# Allegro board SCHOLAR_BOARD_FILE.brd
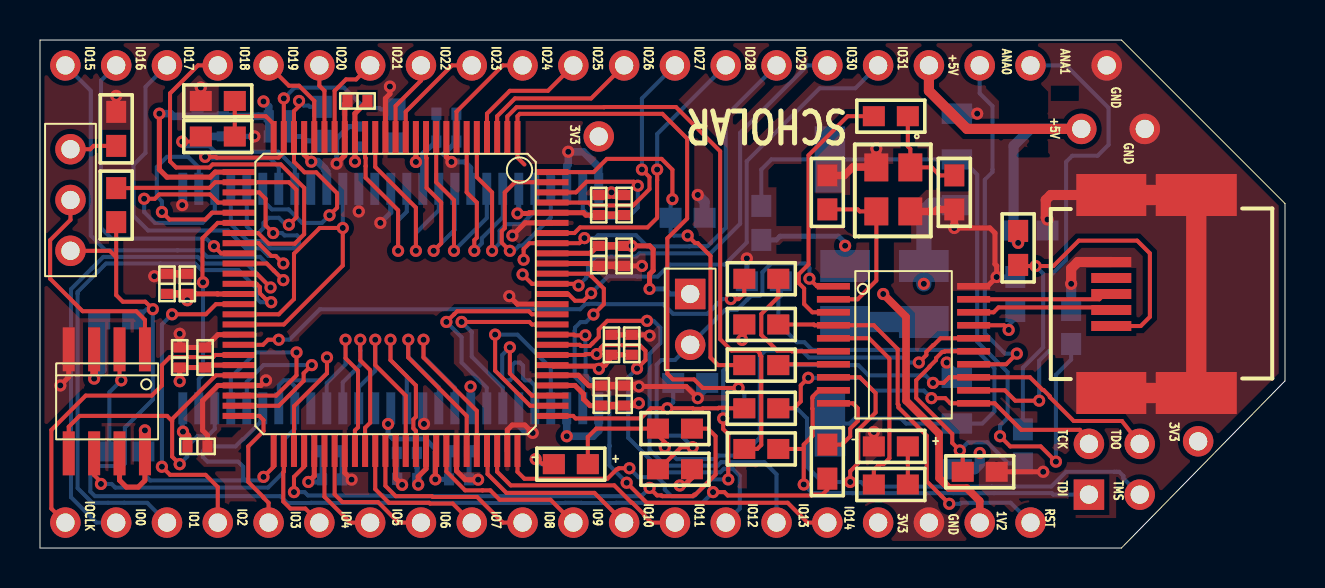
[diagram p0: board, top side]
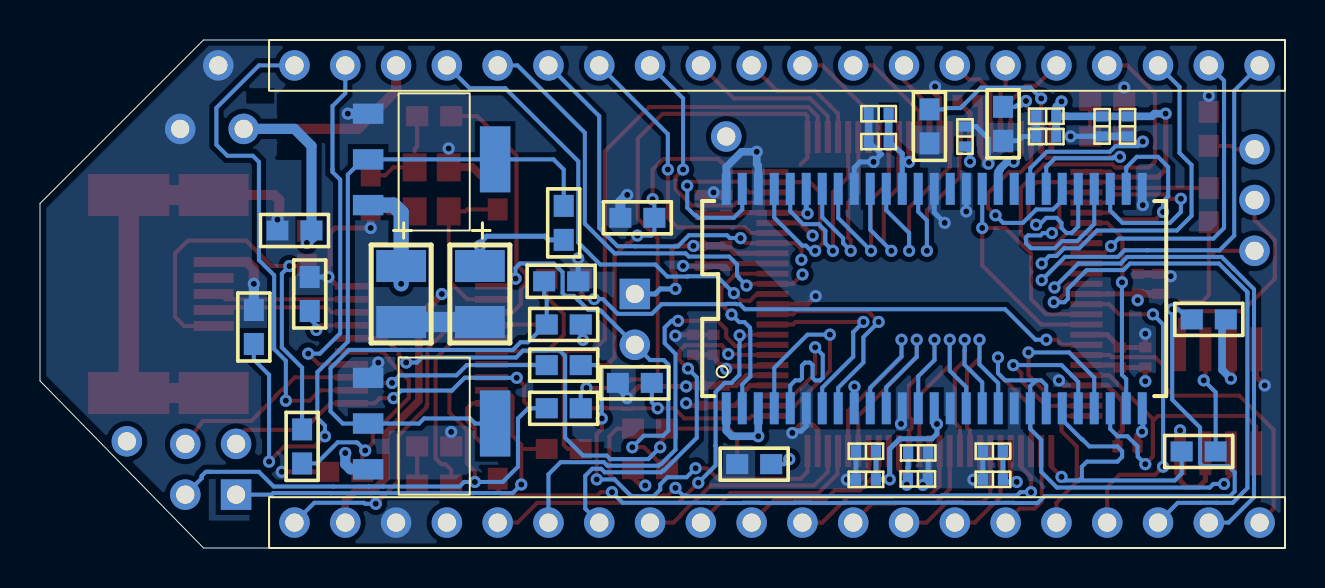
[diagram p1: board, bottom side, seen from below]

Outline 62.26 x 25.4 mm; copper layers: TOP, GND, PWR, BOTTOM. Coordinates in mm from the lower left corner of the outline.
Outline path: 0,25.4 0,0 54.08,0 62.26,8.36 62.26,17.22 54.08,25.4 0,25.4

## Design rules (mm)
net group USB_D: nets USB_D+ USB_D-
net group MG1: nets A0 A1 A2 A3 A4 A5 A6 A7 A8 A9 A10 A11 BS CAS# D0 D1 D2 D3 D4 D5 D6 D7 D8 D9 D10 D11 D12 D13 D14 D15 RAS# SDRAM_CLK WE#
nets with their own width: min track width 0.254; nets +5V GND_POWER VCC_1.2V VCC_3.3V

## Placement (name value [footprint] x y rotation side)
C1  0.47uf  [C0603]  48.77 12.7 90 bottom
C2  10PF  [C0603]  45.72 17.78 90 top
C3  10PF  [C0603]  39.37 17.78 270 top
C4  0.1uF  [C0402]  20.95 3.43 0 bottom
C5  0.1uF  [C0402]  27.94 17.14 90 top
C6  0.1uF  [C0402]  27.94 14.61 270 top
C7  0.1uF  [C0402]  14.61 3.43 0 bottom
C8  0.1uF  [C0402]  20.32 21.72 0 bottom
C9  0.1uF  [C0402]  28.07 7.62 90 top
C10  0.1uF  [C0402]  9.14 21.08 270 bottom
C11  0.1uF  [C0402]  11.94 20.57 0 bottom
C12  0.1uF  [C0402]  7.87 5.08 0 top
C13  0.1uF  [C0402]  7.87 21.08 270 bottom
C14  0.1uF  [C0402]  6.99 9.53 90 top
C15  0.01uF  [C0402]  29.21 14.61 270 top
C16  0.01uF  [C0402]  20.95 4.84 0 bottom
C17  0.01uF  [C0402]  8.26 9.53 90 top
C18  0.01uF  [C0402]  20.32 20.32 0 bottom
C19  0.01uF  [C0402]  14.61 4.84 0 bottom
C20  0.01uF  [C0402]  29.21 7.62 90 top
C21  0.01uF  [C0402]  11.94 21.59 0 bottom
C22  0.01uF  [C0402]  29.21 17.14 90 top
C23  0.1uF  [C0402]  18.34 4.76 180 bottom
C24  0.1uF  [C0402]  6.35 13.21 90 top
C25  0.1uF  [C0402]  28.57 10.16 90 top
C26  0.1uF  [C0402]  7.37 13.21 90 top
C27  0.01uF  [C0402]  16 20.57 90 bottom
C28  0.01uF  [C0402]  29.59 10.16 90 top
C29  0.01uF  [C0402]  15.88 22.35 180 top
C30  0.01uF  [C0402]  18.36 3.45 180 bottom
C31  4.7uF  [C0603]  49.53 15.88 0 bottom
C32  4.7uF  [C0603]  36.2 13.34 180 bottom
C33  22uF  [C1210]  44.2 12.7 270 bottom
C34  4.7uF  [C0603]  51.56 11.05 90 bottom
C35  22uF  [C1210]  40.26 12.7 270 bottom
D1  LED  [D0603]  42.55 5.08 180 top
D2  LED  [D0603]  26.54 4.19 180 top
J1  CON20  [JUMPER1X20]  1.27 1.27 0 top
J2  CON20  [JUMPER1X20]  1.27 24.13 0 top
J3  HEADER 2X2  [JUMPER2X2_SAPT]  52.45 2.67 0 top
J7  USB_MINI_RECEP  [USB_SAPT]  53.57 11.1 90 top
J8  PWR  [JUMPER2]  32.51 12.7 270 top
JP1  3PIN JUMPER  [JUMPER3]  1.52 14.86 90 top
NOREF  -  []  -0.64 0 90 top
NOREF#2  -  []  0 0 0 top
NOREF#3  -  []  13.97 1.27 90 top
R1  5.1K  [R0603]  36.07 11.18 0 top
R2  100E  [R0603]  36.07 9.14 180 top
R3  5.1K  [R0603]  42.55 21.59 0 top
R4  100E  [R0603]  31.75 5.97 0 top
R5  100E  [R0603]  36.07 4.95 180 top
R6  100E  [R0603]  36.07 9.14 180 bottom
R7  100E  [R0603]  36.07 13.46 0 top
R8  100E  [R0603]  36.07 6.99 180 bottom
R9  100E  [R0603]  36.07 6.99 180 top
R10  330E  [R0603]  42.55 3.17 0 top
R11  1K  [R0603]  32.38 16.51 0 bottom
R12  1K  [R0603]  32.51 8.26 0 bottom
R13  47K  [R0603]  3.81 11.43 180 bottom
R14  1K  [R0603]  3.81 17.14 270 top
R15  110E  [R0603]  4.32 4.83 180 bottom
R16  1K  [R0603]  14.1 21.21 90 bottom
R17  1K  [R0603]  17.78 21.08 90 bottom
R18  0E  [R0603]  8.89 20.57 0 top
R19  330K  [R0603]  49.15 5.08 90 bottom
R20  0E  [R0603]  48.91 15 90 top
R21  0E  [R0603]  36.07 11.18 180 bottom
R22  680K  [R0603]  46.99 3.81 0 top
R23  0E  [R0603]  36.07 16.26 270 bottom
R24  0E  [R0603]  31.75 3.94 180 top
R25  330E  [R0603]  26.54 4.19 0 bottom
R26  1K  [R0603]  3.81 20.95 90 top
R27  100E  [R0603]  39.37 4.32 90 top
R28  1K  [R0603]  8.89 22.35 0 top
TP1  VCC_3.3V  [TP_MINI]  57.91 5.33 0 top
TP2  VCC_3.3V  [TP_MINI]  27.94 20.57 0 top
TP3  TEST POINT  [TP_MINI]  55.24 20.95 0 top
TP4  5V_VCC  [TP_MINI]  52.07 20.95 0 top
TP5  TEST POINT  [TP_MINI]  53.34 24.13 0 top
U1  XC3S200A-VQG100  [VQFP100]  17.78 12.7 270 top
U2  PIC18LF14K50-SSOP  [SSOP20]  43.18 10.16 0 top
U3  W25X20BV  [SOIC8LP]  5.21 10.03 270 top
U4  W9812G6JH  [TSOP54_4]  27.94 6.99 90 bottom
U5  +3.3VREG  [SOT-223]  47.12 9.78 270 bottom
U6  +1.2VREG  [SOT-223]  47.12 22.99 270 bottom
Y1  12MHz  [XTAL]  42.55 17.78 90 top

## Library data of the parts
C1 = CAPACITOR_1: User Part Number: PARTNUM; Tolerance: TOLERANCE
C2 C3 = CAP NP: User Part Number: PARTNUM; Tolerance: TOLERANCE
C4-C30 = CAPACITOR NON-POL: Tolerance: #tolerance
C31 C32 C34 = CAP POL: User Part Number: PARTNUM; Tolerance: TOLERANCE
C33 C35 = CAP POL
D1 D2 = LED_5: User Part Number: PARTNUM; Tolerance: TOLERANCE
J1 J2 = CON20_0: User Part Number: ***
J3 = HEADER 2X2: User Part Number: ***
J7 = USB_MINI_RECEP
J8 = JUMPER: User Part Number: ***
JP1 = 3PIN JUMPER: User Part Number: ***
R1-R18 R25-R28 = RESISTOR: User Part Number: PARTNUM; Tolerance: TOLERANCE
R19-R24 = R: User Part Number: PARTNUM; Tolerance: TOLERANCE
TP1-TP5 = TEST POINT_0
U1 = XC3S200A: User Part Number: ***; Tolerance: ***
U2 = PIC18F_5: User Part Number: ***; Tolerance: ***
U3 = W25X20BV: User Part Number: ***; Tolerance: ***
U4 = SDRAM
U5 = REG_0.3V
U6 = REG_0.2V
Y1 = 12MHz

## Footprints (pads in the part's own frame, mm; a bottom-side part is the same pattern mirrored in y, then rotated)
C0402
  rect 0.508x0.61 smd: 1(-0.5,0) 2(0.5,0)
C0603
  rect 1.1x1 smd: 1(-0.85,0) 2(0.85,0)
C1210
  rect 1.6x2.489 smd: 1(-1.4,0) 2(1.4,0)
D0603
  rect 1.1x1 smd: 1(-0.85,0) 2(0.85,0)
JUMPER1X20
  round 1.524 hole 0.914: 1(0,0) 2(2.54,0) 3(5.08,0) 4(7.62,0) 5(10.16,0) 6(12.7,0) 7(15.24,0) 8(17.78,0) 9(20.32,0) 10(22.86,0) 11(25.4,0) 12(27.94,0) 13(30.48,0) 14(33.02,0) 15(35.56,0) 16(38.1,0) 17(40.64,0) 18(43.18,0) 19(45.72,0) 20(48.26,0)
JUMPER2
  rect 1.524x1.524 hole 0.914: 1(0,0)
  round 1.524 hole 0.914: 2(2.54,0)
JUMPER2X2_SAPT
  rect 1.524x1.524 hole 0.914: 1(0,0)
  round 1.524 hole 0.914: 2(0,2.54) 3(2.54,0) 4(2.54,2.54)
JUMPER3
  round 1.524 hole 0.914: 1(0,0) 2(2.54,0) 3(5.08,0)
R0603
  rect 1.1x1 smd: 1(-0.85,0) 2(0.85,0)
SOIC8LP
  rect 2.2x0.6 smd: 1(0.1,0.04) 2(0.1,-1.23) 3(0.1,-2.5) 4(0.1,-3.77) 5(5.3,-3.77) 6(5.3,-2.5) 7(5.3,-1.23) 8(5.3,0.04)
SOT-223
  rect 1.016x1.524 smd: 1(1.27,1.27) 2(3.556,1.27) 3(5.842,1.27)
  rect 3.302x1.524 smd: 4(3.556,7.62)
SSOP20
  rect 1.651x0.33 smd: 1(-3.505,2.926) 2(-3.505,2.276) 3(-3.505,1.626) 4(-3.505,0.975) 5(-3.505,0.325) 6(-3.505,-0.325) 7(-3.505,-0.975) 8(-3.505,-1.626) 9(-3.505,-2.276) 10(-3.505,-2.926) 11(3.505,-2.926) 12(3.505,-2.276) 13(3.505,-1.626) 14(3.505,-0.975) 15(3.505,-0.325) 16(3.505,0.325) 17(3.505,0.975) 18(3.505,1.626) 19(3.505,2.276) 20(3.505,2.926)
TP_MINI
  round 1.524 hole 0.914: 1(0,0)
TSOP54_4
  rect 1.6x0.45 smd: 1(0,0) 2(0,-0.8) 3(0,-1.6) 4(0,-2.4) 5(0,-3.2) 6(0,-4) 7(0,-4.8) 8(0,-5.6) 9(0,-6.4) 10(0,-7.2) 11(0,-8) 12(0,-8.8) 13(0,-9.6) 14(0,-10.4) 15(0,-11.2) 16(0,-12) 17(0,-12.8) 18(0,-13.6) 19(0,-14.4) 20(0,-15.2) 21(0,-16) 22(0,-16.8) 23(0,-17.6) 24(0,-18.4) 25(0,-19.2) 26(0,-20) 27(0,-20.8) 28(10.973,-20.8) 29(10.973,-20) 30(10.973,-19.2) 31(10.973,-18.4) 32(10.973,-17.6) 33(10.973,-16.8) 34(10.973,-16) 35(10.973,-15.2) 36(10.973,-14.4) 37(10.973,-13.6) 38(10.973,-12.8) 39(10.973,-12) 40(10.973,-11.2) 41(10.973,-10.4) 42(10.973,-9.6) 43(10.973,-8.8) 44(10.973,-8) 45(10.973,-7.2) 46(10.973,-6.4) 47(10.973,-5.6) 48(10.973,-4.8) 49(10.973,-4) 50(10.973,-3.2) 51(10.973,-2.4) 52(10.973,-1.6) 53(10.973,-0.8) 54(10.973,0)
USB_SAPT
  rect 0.5x2 smd: 1(0,0) 2(0.8,0) 3(1.6,0) 4(2.4,0) 5(3.2,0)
  rect 2.1x4.05 smd: 6(-3.35,-4.25) 7(6.55,-4.25)
  rect 2.1x3.5 smd: 8(-3.35,0) 9(6.55,0)
VQFP100
  rect 1.6x0.3 smd: 1(-7.849,6.096) 2(-7.849,5.588) 3(-7.849,5.08) 4(-7.849,4.572) 5(-7.849,4.064) 6(-7.849,3.556) 7(-7.849,3.048) 8(-7.849,2.54) 9(-7.849,2.032) 10(-7.849,1.524) 11(-7.849,1.016) 12(-7.849,0.508) 13(-7.849,0) 14(-7.849,-0.508) 15(-7.849,-1.016) 16(-7.849,-1.524) 17(-7.849,-2.032) 18(-7.849,-2.54) 19(-7.849,-3.048) 20(-7.849,-3.556) 21(-7.849,-4.064) 22(-7.849,-4.572) 23(-7.849,-5.08) 24(-7.849,-5.588) 25(-7.849,-6.096) 51(7.849,-6.096) 52(7.849,-5.588) 53(7.849,-5.08) 54(7.849,-4.572) 55(7.849,-4.064) 56(7.849,-3.556) 57(7.849,-3.048) 58(7.849,-2.54) 59(7.849,-2.032) 60(7.849,-1.524) 61(7.849,-1.016) 62(7.849,-0.508) 63(7.849,0) 64(7.849,0.508) 65(7.849,1.016) 66(7.849,1.524) 67(7.849,2.032) 68(7.849,2.54) 69(7.849,3.048) 70(7.849,3.556) 71(7.849,4.064) 72(7.849,4.572) 73(7.849,5.08) 74(7.849,5.588) 75(7.849,6.096)
  rect 0.3x1.6 smd: 26(-6.096,-7.849) 27(-5.588,-7.849) 28(-5.08,-7.849) 29(-4.572,-7.849) 30(-4.064,-7.849) 31(-3.556,-7.849) 32(-3.048,-7.849) 33(-2.54,-7.849) 34(-2.032,-7.849) 35(-1.524,-7.849) 36(-1.016,-7.849) 37(-0.508,-7.849) 38(0,-7.849) 39(0.508,-7.849) 40(1.016,-7.849) 41(1.524,-7.849) 42(2.032,-7.849) 43(2.54,-7.849) 44(3.048,-7.849) 45(3.556,-7.849) 46(4.064,-7.849) 47(4.572,-7.849) 48(5.08,-7.849) 49(5.588,-7.849) 50(6.096,-7.849) 76(6.096,7.849) 77(5.588,7.849) 78(5.08,7.849) 79(4.572,7.849) 80(4.064,7.849) 81(3.556,7.849) 82(3.048,7.849) 83(2.54,7.849) 84(2.032,7.849) 85(1.524,7.849) 86(1.016,7.849) 87(0.508,7.849) 88(0,7.849) 89(-0.508,7.849) 90(-1.016,7.849) 91(-1.524,7.849) 92(-2.032,7.849) 93(-2.54,7.849) 94(-3.048,7.849) 95(-3.556,7.849) 96(-4.064,7.849) 97(-4.572,7.849) 98(-5.08,7.849) 99(-5.588,7.849) 100(-6.096,7.849)
XTAL
  rect 1.4x1.2 smd: 1(1.25,-0.975) 2(-0.95,-0.975) 3(-0.95,0.725) 4(1.25,0.725)

## Nets
+5V: C31.1 J2.18 R20.2 TP4.1 U5.3(IN)
GND_POWER: C1.2(N) C2.1 C3.1 C4.2 C5.2 C6.2 C7.2 C8.2 C9.2 C10.2 C11.2 C12.2 C13.2 C14.2 C15.2 C16.2 C17.2 C18.2 C19.2 C20.2 C21.2 C22.2 C23.2 C24.2 C25.2 C26.2 C27.2 C28.2 C29.2 C30.2 C31.2 C32.2 C33.2 C34.2 C35.2 D1.2(CATHODE) J1.18 J7.5(GND) J7.6(GND1) J7.7(GND2) J7.8(GND3) J7.9(GND4) R11.2 R12.2 R16.1 R17.1 R22.2 R25.2 R26.2 R28.1 TP3.1 TP5.1 U1.8(GND_1) U1.14(GND_5) U1.18(GND_11) U1.42(GND_3) U1.47(GND_2) U1.58(GND_6) U1.63(GND_13) U1.69(GND_4) U1.74(GND_10) U1.80(GND_12) U1.87(GND_7) U1.91(GND_8) U1.95(GND_9) U2.20(VSS) U3.4(GND) U4.6(VSSQ3) U4.12(VSSQ2) U4.15(LDQM) U4.19(CS#) U4.28(VSS3) U4.39(VDQM) U4.41(VSS2) U4.46(VSSQ4) U4.52(VSSQ1) U4.54(VSS1) U5.1(GND) U6.1(GND) Y1.2 Y1.4
VCC_1.2V: C23.1 C24.1 C25.1 C26.1 C27.1 C28.1 C29.1 C30.1 C35.1 J1.19 R23.2 U1.17(VCCINT_2) U1.38(VCCINT_1) U1.66(VCCINT_3) U1.81(VCCINT_4)
VCC_3.3V: C4.1 C5.1 C6.1 C7.1 C8.1 C9.1 C10.1 C11.1 C12.1 C13.1 C14.1 C15.1 C16.1 C17.1 C18.1 C19.1 C20.1 C21.1 C22.1 C33.1 J1.17 J8.1 R1.1 R13.2 R21.2 R24.1 TP1.1 TP2.1 U1.11(VCC0_6) U1.22(VCCAUX_1) U1.26(VCC0_5) U1.45(VCC0_4) U1.55(VCCAUX_3) U1.67(VCC0_3) U1.79(VCC0_2) U1.92(VCCAUX_2) U1.96(VCC0_1) U3.3(WP#) U3.7(HOLD#) U3.8(VCC) U4.1(VDD3) U4.3(VDDQ3) U4.9(VDDQ2) U4.14(VDD1) U4.27(VDD2) U4.37(CKE) U4.43(VDDQ1) U4.49(VDD4) U6.3(IN)
A0: U1.49(IO_L10_2/D3) U4.23(A0)
A1: U1.48(IO_L10P_2/INIT_B) U4.24(A1)
A2: U1.46(IO_2/MOSI/CS1_B) U3.5(DI) U4.25(A2)
A3: U1.31(IO_L04N_2/VS0) U4.26(A3)
A4: U1.30(IO_L04P_2/VS1) U4.29(A4)
A5: U1.29(IO_L03N_2/VS2) U4.30(A5)
A6: U1.28(IO_L03P_2/RDWR_B) U4.31(A6)
A7: R14.1 U1.27(IO_L02N_2/CS0_B) U4.32(A7)
A8: R16.2 U1.23(IO_L01P_2/M1) U4.33(A8)
A9: R17.2 U1.24(IO_L02P_2/M2) U4.34(A9)
A10: R15.1 U1.51(IO_L12P_2/D0/DIN/MSIO) U4.22(A10/AP)
A11: R18.1 U4.35(A11)
BS: U1.53(IO_L12N_2/CCLK) U3.6(CLK) U4.20(BS0) U4.21(BS1)
CAS#: U1.60(IO_L02N_1/RHCLK1) U4.17(CAS#)
CHAN0: J1.2 U1.36(IO_L07P_2/05)
CHAN1: J1.3 U1.37(IO_L07N_2/04)
CHAN2: J1.4 U1.39(IP_2/VREF_2)
CHAN3: J1.5 U1.50(IO_L11_2/D2)
CHAN4: J1.6 U1.52(IO_L11N_2/D1)
CHAN5: J1.7 U1.56(IO_L01P_1)
CHAN6: J1.8 U1.57(IO_L01N_1)
CHAN7: J1.9 U1.61(IO_L03P_1/RHCLK2)
CHAN8: J1.10 U1.62(IO_L03N_1/TRDY1/RHCLK3)
CHAN9: J1.11 U1.68(IP_1/VREF_1)
CHAN10: J1.12 U1.72(IO_L06P_1)
CHAN11: J1.13 U1.73(IO_L06N_1)
CHAN12: J1.14 U1.82(IP_0/VREF_0)
CHAN13: J1.15 U1.83(IO_L02P_0/GCLK14)
CHAN14: J1.16 U1.84(IO_L02N_0/GCLK5)
CHAN15: J2.1 U1.35(IO_L06N_2/06)
CHAN16: J2.2 U1.34(IO_L06P_2/07)
CHAN17: J2.3 U1.33(IO_L05N_2)
CHAN18: J2.4 U1.32(IO_L05P_2)
CHAN19: J2.5 U1.21(IP_3)
CHAN20: J2.6 U1.20(IO_L06N_3)
CHAN21: J2.7 U1.19(IO_L06P_3)
CHAN22: J2.8 U1.13(IO_L04M_3/IRDY2/LHCLK3)
CHAN23: J2.9 U1.12(IO_L0P4P_3/LHCLK2)
CHAN24: J2.10 U1.7(IP_3/VREF_3)
CHAN25: J2.11 U1.4(IO_L01N_3`)
CHAN26: J2.12 U1.3(IO_L01P_3)
CHAN27: J2.13 U1.97(IP_0)
CHAN28: J2.14 U1.94(IO_L05N_0)
CHAN29: J2.15 U1.93(IO_L05P_0)
CHAN30: J2.16 U1.89(IO_L04N_0/GCLK9)
CHAN31: J2.17 U1.88(IO_L04P_0/GCLK8)
CHAN_CLK: J1.1 U1.44(IO_L09N_2/GCLK1)
D0: U1.90(IO_0/GCLK11) U4.2(DQ0)
D1: U1.77(IO_L01P_0/VREF_0) U4.4(DQ1)
D2: U1.78(IO_L01N_0) U4.5(DQ2)
D3: U1.85(IO_L03P_0/GCLK6) U4.7(DQ3)
D4: U1.86(IO_L03N_0/GCLK7) U4.8(DQ4)
D5: U1.71(IO_L05N_1) U4.10(DQ5)
D6: U1.70(IO_L05P_1) U4.11(DQ6)
D7: U1.65(IO_L04N_1/RHCLK7) U4.13(DQ7)
D8: U1.16(IO_L05N_3/LHCLK7) U4.42(DQ8)
D9: U1.15(IO_L05P_3/TRDY2/LHCLK3) U4.44(DQ9)
D10: U1.10(IO_L0P3N_3/LHCLK0) U4.45(DQ10)
D11: U1.9(IO_L0P3P_3/LHCLK0) U4.47(DQ11)
D12: U1.6(IO_L02N_3) U4.48(DQ12)
D13: U1.5(IO_L02P_3) U4.50(DQ13)
D14: U1.99(IO_L06N_0/PUDC_B) U4.51(DQ14)
D15: U1.98(IO_L06P_0/VREF_0) U4.53(DQ15)
DONE: D2.1(ANODE) R4.1 U2.16(RC0/AN4/C12IN+/INT0/VREF+)
FLSH_CS#: JP1.2 U3.1(CS#)
FLSH_DSBL: JP1.1 R13.1 R14.2 R27.1
FPGA_CLK: R7.1 U1.43(IO_L09P_2/GCLK0)
MCLR: J1.20 R1.2 U2.4(RA3/IOCA3//MCLR/VPP)
OSC1: C3.2 U2.2(RA5/IOCA5/OSC1/CLKIN) Y1.3
OSC2: R3.1 U2.3(RA4/AN3/IOCA3/OSC2/CLKOUT)
PROG#: R2.1 U2.7(RC3/AN7/P1C/C12IN3-/PGM)
RAS#: U1.59(IO_L02P_1/RHCLK0) U4.18(RAS#)
SDRAM_CLK: U1.40(IO_L08P_2/GCLK14) U1.41(IO_L08N_2/GCLK15) U4.38(CLK)
SENSE_USB: R19.1 R22.1 U2.15(RC1/AN5/C12IN1-/INT1/VREF-)
TCK: J3.2(4) R9.1 U2.11(RB6/IOCB6/SCK/SCL)
TDI: J3.1(3) R5.1 U2.9(RC7/AN9/SDO/T1OSCO)
TDO: J3.4(2) R6.1 U2.13(RB4/AN10/IOCB4/SDI/SDA)
TMS: J3.3(1) R8.1 U2.8(RC6/AN8//SS/T13CKI/T1OSCI)
TP1: J2.19 U2.14(RC2/AN6/P1D/C12IN2-/CVREF/INT2)
TP2: J2.20 U2.12(RB5/AN11/IOCB5/RX/DT)
USB_D+: J7.3(D+) U2.19(RA0/IOCA0/D+/PGD)
USB_D-: J7.2(D-) U2.18(RA1/IOCA1/D-/PGC)
VUSB: C1.1(P) U2.17(VUSB)
WE#: U1.64(IO_L04P_1/IRDY1/RHCLK6) U4.16(WE#)
N10334858: R4.2 U1.54(DONE)
N10334861: R5.2 U1.2(TDI)
N10334864: R6.2 U1.75(TDO)
N10334867: R8.2 U1.1(TMS)
N10334870: R9.2 R12.1 U1.76(TCK)
N10335069: R2.2 R11.1 U1.100(PROG_B)
N10919966: J8.2 R24.2 U2.1(VDD)
N10920028: D1.1(ANODE) R10.2
N10920048: R10.1 U2.5(RC5/CCP1/P1A/T0CKI)
N10920094: R7.2 U2.6(RC4/P1B/C12OUT/SRQ)
N10926413: C2.2 R3.2 Y1.1
N10932650: R15.2 U3.2(DO)
N10944133: J7.1(VBUS) R19.2 R20.1
N10944365: C32.1 R21.1 U5.2(OUT) U5.4(HS)
N10944381: C34.1 R23.1 U6.2(OUT) U6.4(HS)
N10948862: R18.2 R28.2 U1.25(IO_L01N_2/M0)
N10957517: D2.2(CATHODE) R25.1
N10958217: JP1.3 R26.1
N10958271: R27.2 U2.10(RB7/IOCB7/TX/CK)

Pads without a net: J7 4; U4 36 40

## Via types
v1: diameter 0.61, hole 0.305, TOP to BOTTOM, 152 vias

## Routing (per net, layer and track width the routed paths; a pad name or vN(x,y) marks a point on that pad's centre or on a via; arc(x,y) is an arc through that point)
+5V: length 20.8
  TOP w0.508: TP4.1 46.35,20.95 44.45,22.86 J2.18 ; R20.2 v1(48.91,15.26)
  BOTTOM w0.508: 45.85,3.94 46.74,3.94 46.99,4.19 v1(46.99,4.75) ; v1(48.91,15.26) 48.68,15.49 C31.1 48.68,20.11 49.53,20.95 TP4.1
GND_POWER: length 134.6
  TOP w0.254: v1(14.83,19.22) 15.24,19.63 U1.18 15.24,22.22 C29.2 ; U1.63 17.78,3.48 v1(18.11,3.16) ; U1.8 20.32,19.56 v1(20.57,19.3) ; U1.91 27.64,14.22 27.76,14.1 C6.2 ; R22.2 v1(50.16,3.81) ; v1(24.64,5.75) 24.24,6.15 23.61,6.15 23.37,5.91 U1.74 ; U1.80 26.92,8.64 27.44,8.12 C9.2 ; v1(11.3,8.38) 11.05,8.13 U1.47 8.9,8.13 8.13,7.36 8.13,5.88 8.37,5.64 C12.2 ; U1.69 20.83,3.86 21.27,3.42 v1(21.91,3.42) ; U1.87 23.87,12.19 v1(23.47,12.59) ; U1.14 17.27,22.48 17.5,22.71 v1(17.5,23.07) ; v1(29.95,8.08) 32.31,8.08 v1(32.89,7.49) ; C25.2 C28.2 30.44,10.66 30.48,10.62 v1(30.49,10.62) ; U1.42 8.9,10.67 C17.2 C14.2 v1(6.99,10.71) ; C15.2 v1(30.1,14.1) ; v1(15.58,3.42) 15.24,3.76 U1.58 ; C24.2 5.83,13.71 v1(5.71,13.59) ; U2.20 47.37,13.09 v1(47.84,13.55) 47.84,14.11 47.75,14.19 47.75,15.75 47.5,16 v1(45.72,16) ; U1.95 24.26,16.26 v1(23.62,15.62) ; v1(1.02,8.13) 1.44,8.55 U3.4
  TOP w0.381: R28.1 v1(8.04,23.03) ; C22.2 28.71,17.65 v1(28.57,17.78) 28.44,17.65 C5.2 ; C15.2 28.78,14.1 28.75,14.14 28.26,14.14 28.23,14.1 C6.2 ; C9.2 C20.2 29.9,8.12 v1(29.95,8.08) ; Y1.4 41.8,19.05 40.64,19.05 40.22,18.63 C3.1 ; D1.2 v1(41.7,5.8) ; Y1.2 44.8,16.83 44.9,16.93 C2.1 v1(45.72,16) ; R26.2 v1(3.81,22.61) ; C24.2 C26.2
  TOP w0.508: Y1.4 v1(41.82,19.98) ; J7.9 50.54,17.65 50.29,17.4 50.29,16.51 v1(50.38,16.42) ; J7.5 51.89,14.3 51.56,13.97 v1(51.56,13.21)
  TOP w1.016: J7.9 J7.7 J7.6 J7.8
  BOTTOM w0.254: C1.2 v1(47.84,13.55) ; v1(14.83,19.22) 14.83,20.46 15.44,21.07 C27.2 ; v1(17.02,16.26) 17.54,16.78 U4.41 ; C18.2 20.19,19.69 v1(20.57,19.3) 21.25,19.3 21.54,19.01 U4.46 ; v1(21.91,3.42) 21.89,3.43 C4.2 C16.2 ; U4.28 7.14,17.17 v1(7.11,17.14) ; C11.2 13.13,20.57 13.34,20.36 R16.1 ; C19.2 C7.2 15.57,3.43 v1(15.58,3.42) ; 45.85,8.51 45.85,8.76 v1(45.34,9.27) ; v1(32.89,7.49) 33.36,7.96 R12.2 ; 10.55,20.58 C10.2 ; 10.55,20.58 10.54,20.57 ; 10.55,20.58 v1(10.72,20.58) ; C23.2 17.84,3.47 C30.2 17.86,3.41 v1(18.11,3.16) ; U4.39 v1(15.94,16.83) ; v1(19.2,6.21) 19.2,6.92 19.14,6.99 19.14,6.4 ; U4.6 23.94,6.1 24.19,5.84 24.55,5.84 v1(24.64,5.75) ; v1(35.35,14.48) C32.2
  BOTTOM w0.381: U4.52 26.34,19.11 26.42,19.19 v1(26.42,19.81) 27.17,19.81 27.94,19.04 U4.54 ; C21.2 C11.2 ; C8.2 C18.2 ; C10.2 C13.2
  BOTTOM w0.508: R11.2 33.23,17.31 v1(32.89,17.65) ; C34.2 v1(51.56,13.21) ; 45.85,21.72 v1(46.86,21.72) ; C31.2 v1(50.38,16.42)
  BOTTOM w1.016: C35.2 C33.2
VCC_1.2V: length 35.7
  TOP w0.254: C29.1 15.75,21.72 U1.17 15.75,19.32 v1(15.75,19.32) ; 28.19,9.14 28.1,9.14 28.04,9.09 25.68,9.09 U1.81 ; 28.19,9.14 28.07,9.02 28,9.02 v1(27.95,8.96) ; 28.19,9.14 28.26,9.14 28.57,9.57 C25.1 C28.1 ; 6.36,12.7 C24.1 ; v1(18.91,3.17) 18.91,3.57 19.3,3.96 U1.66 ; U1.38 8.88,12.7 8.87,12.71 C26.1
  TOP w0.381: C24.1 C26.1 v1(7.37,12.39) ; J1.19 46.99,2.35 46.35,2.99 45.46,2.99 44.96,3.49 44.96,5.71 43.31,7.37 43.31,11.56 v1(42.16,12.7)
  BOTTOM w0.254: C27.1 15.95,20.07 15.75,19.88 v1(15.75,19.32) ; C23.1 18.84,4.03 18.86,4.01 C30.1 18.91,3.4 v1(18.91,3.17) ; v1(40.26,15.11) 40.26,15.26 39.93,15.59 37,15.59 36.82,15.41 R23.2
  BOTTOM w0.508: C35.1 v1(40.26,15.11)
VCC_3.3V: length 86.5
  TOP w0.254: v1(5.97,21.72) 5.97,18.92 6.35,18.54 8.51,18.54 8.76,18.8 U1.26 ; U3.7 3.98,3.39 4.32,3.05 4.92,3.05 5.25,3.38 U3.8 v1(5.25,5.88) ; v1(13.42,3.3) 13.72,3.6 U1.55 ; v1(29.95,7.24) 29.83,7.12 C20.1 ; v1(30.48,12.95) 30.48,13.7 30.66,13.87 30.66,14.94 30.49,15.11 v1(29.58,15.11) C15.1 ; C5.1 27.3,16.64 27.18,16.76 U1.96 24.47,16.76 24.43,16.73 v1(23.88,16.73) ; v1(31.99,3.12) 32.21,3.12 32.6,3.52 R24.1 ; U1.22 13.21,19.67 v1(13.57,19.32) ; C6.1 27.89,15.11 27.52,14.73 U1.92 ; v1(18.8,19.3) U1.11 ; v1(19.77,3.43) 19.77,4.81 U1.67 ; C9.1 27.51,7.12 27.18,7.45 27.18,7.7 26.75,8.13 U1.79 ; v1(35.11,10.41) 35.11,10.6 35.22,10.71 R1.1 ; U1.45 8.37,9.14 C17.1 C14.1 v1(6.99,8.34)
  TOP w0.381: C6.1 C15.1 ; C9.1 C20.1 ; v1(7.15,5.82) 7.37,5.59 C12.1 ; C5.1 C22.1 ; U3.3 v1(2.71,8.47)
  BOTTOM w0.254: v1(18.8,19.3) 19.14,19.3 ; 19.14,19.3 19.14,19.72 19.18,19.76 C18.1 ; 19.14,19.3 U4.43 ; v1(21.53,8.07) 21.54,8.06 U4.9 ; R1.1 35.22,10.71 35.11,10.6 v1(35.11,10.41) ; 7.14,6.99 7.11,6.96 7.11,5.85 v1(7.15,5.82) ; J8.1 31.5,12.7 31.24,12.95 v1(30.48,12.95) ; C19.1 C7.1 13.98,3.3 v1(13.42,3.3) ; 10.93,21.59 10.92,21.58 ; v1(23.88,16.73) 23.94,16.79 U4.49 ; C16.1 C4.1 v1(19.77,3.43) 19.77,4.95 19.26,5.46 17.65,5.46 17.4,5.71 v1(17.4,6.2) 17.54,6.34 17.54,6.99
  BOTTOM w0.381: C8.1 C18.1 ; U4.1 27.94,5.87 27.66,5.59 v1(26.34,5.59) U4.3 ; U4.37 14.34,18.82 14.24,18.92 14.24,18.97 13.89,19.32 v1(13.57,19.32) ; C21.1 11.44,22.06 v1(11.18,22.33) ; C21.1 10.93,21.59 ; C21.1 C11.1 ; R13.2 3.15,11.24 3.15,8.91 v1(2.71,8.47) ; v1(5.97,21.72) 6.53,21.72 6.66,21.58 C13.1 C10.1 10.92,21.58
  BOTTOM w0.762: v1(44.2,13.21) C33.1 44.2,16.76 44.58,17.14 45.85,17.14
A0: length 9.6
  TOP w0.203: v1(13.59,9.14) 13.18,8.74 13.18,8.36 11.94,7.11 U1.49
  BOTTOM w0.203: v1(13.59,9.14) 11.18,9.14 10.34,8.31 10.34,6.99
A1: length 9.8
  TOP w0.203: v1(12.83,9.78) 12.83,8.64 11.81,7.62 U1.48
  BOTTOM w0.203: v1(12.83,9.78) 10.79,9.78 9.54,8.52 9.54,6.99
A2: length 17.3
  TOP w0.203: 6.61,6.35 6.35,6.6 1.98,6.6 1.44,6.06 U3.5 ; 6.61,6.35 6.61,6.45 8.8,8.64 U1.46 ; 6.61,6.35 6.61,4.57 v1(6.99,4.19)
  BOTTOM w0.203: v1(6.99,4.19) 7.36,4.57 7.36,4.73 7.37,4.74 7.37,5.08 7.88,5.59 8.37,5.59 8.74,5.96 8.74,6.99
A3: length 10.7
  TOP w0.203: U1.31 8.89,16.26 8.12,15.49 8.12,13.31 v1(8.15,13.28)
  BOTTOM w0.203: v1(8.15,13.28) 8.15,8.66 7.94,8.45 7.94,6.99
A4: length 10.1
  TOP w0.203: U1.30 8.6,16.76 8.26,16.42 6.47,16.42 v1(6.1,16.8)
  BOTTOM w0.203: U4.29 7.94,19.03 7.41,19.56 6.35,19.56 5.84,19.05 5.84,17.59 6.1,17.33 v1(6.1,16.8)
A5: length 10.7
  TOP w0.203: U1.29 8.9,17.27 8.5,17.68 5.96,17.68 5.74,17.46 v1(5.21,17.46)
  BOTTOM w0.203: U4.30 8.74,16.87 8.13,16.26 5.75,16.26 5.21,16.8 v1(5.21,17.46)
A6: length 10.8
  TOP w0.203: U1.28 10.96,17.78 11.28,17.46 11.28,16.13 v1(11.66,15.75)
  BOTTOM w0.203: U4.31 9.54,16.2 10.39,15.35 11.15,15.35 11.51,14.99 12.67,14.99 12.7,15.01 12.73,15.01 12.95,15.24 12.95,15.53 12.85,15.63 12.22,15.63 12.11,15.75 v1(11.66,15.75)
A7: length 15.9
  TOP w0.203: v1(12.45,16.16) 12.82,16.54 12.82,17.91 12.45,18.29 U1.27 8.76,18.29 8.48,18.01 4.55,18.01 4.54,17.99 R14.1
  BOTTOM w0.203: U4.32 10.34,16.08 10.67,15.75 10.92,15.75 11.18,16 11.18,16.26 11.43,16.51 11.94,16.51 12.29,16.16 v1(12.45,16.16)
A8: length 13
  TOP w0.203: v1(12.95,22.35) 12.95,22.1 12.7,21.84 U1.23 12.7,19.31 13.23,18.78 13.81,18.78 14.86,17.74 14.86,17.01 v1(14.48,16.64)
  BOTTOM w0.203: v1(12.95,22.35) 13.18,22.12 13.43,22.12 13.49,22.06 R16.2 ; U4.33 11.14,17.38 11.59,16.93 12.43,16.93 13.11,16.26 14.1,16.26 v1(14.48,16.64)
A9: length 18
  TOP w0.203: v1(8.26,19.56) 8.79,19.56 8.83,19.52 11.93,19.52 12.19,19.78 U1.24 v1(12.19,22.48)
  BOTTOM w0.203: v1(8.26,19.56) 8.54,19.56 8.62,19.48 11.51,19.48 11.94,19.05 U4.34 ; v1(12.19,22.48) 12.73,23.02 15.2,23.02 16.23,22 16.98,22 17.04,21.93 R17.2
A10: length 16.3
  TOP w0.203: U1.51 11.68,4.06 v1(11.18,3.56)
  BOTTOM w0.203: 10.29,3.38 5.51,3.38 5.17,3.72 R15.1 ; 10.29,3.38 11,3.38 v1(11.18,3.56) ; 10.29,3.38 10.16,3.51 10.16,4.06 9.91,4.32 8.38,4.32 8.14,4.56 8.14,4.84 8.38,5.08 9.78,5.08 10.13,5.43 10.16,5.43 11.14,6.41 11.14,6.99
A11: length 8.2
  TOP w0.203: v1(7.11,20.32) 7.79,20.32 R18.1
  BOTTOM w0.203: v1(7.11,20.32) 7.34,20.09 8.48,20.09 8.76,19.81 11.91,19.81 12.74,18.99 U4.35
BS: length 26.1
  TOP w0.203: U3.6 2.71,3.64 3.05,3.3 v1(3.05,3.2) ; U1.53 12.7,7.09 14.35,8.74 v1(14.35,9.53)
  BOTTOM w0.203: 12.45,8.38 12.74,8.09 12.74,5.96 12.19,5.41 12.19,3.81 11.4,3.02 3.76,3.02 3.58,3.2 v1(3.05,3.2) ; 12.45,8.38 14,8.38 14.35,8.74 v1(14.35,9.53) ; 12.45,8.38 12.19,8.38 11.94,8.13 11.94,6.99
CAS#: length 9.7
  TOP w0.203: U1.60 16.26,6.01 16.51,6.26 16.51,8.89 16.01,9.39 v1(16.01,10.41)
  BOTTOM w0.203: 15.14,6.99 15.14,8.28 16.03,9.17 16.03,9.87 16.01,9.88 v1(16.01,10.41)
CHAN0: length 26.3
  TOP w0.203: v1(11.53,13.03) 10.84,13.72 U1.36
  BOTTOM w0.203: J1.2 2.82,1.27 1.55,2.54 1.55,12.94 2.58,13.97 3.17,14.55 7.89,14.55 8.22,14.23 10.33,14.23 v1(11.53,13.03)
CHAN1: length 28.5
  TOP w0.203: v1(11.56,12.29) 11.43,12.42 11.31,12.42 11,12.73 11,12.8 10.99,12.8 10.99,13.05 10.83,13.21 U1.37
  BOTTOM w0.203: J1.3 5.36,2.26 4.22,2.26 4.22,2.26 3.4,2.26 3.4,2.26 2.62,2.26 1.88,2.99 1.88,12.8 2.91,13.83 3.3,14.22 6.04,14.22 7.75,14.22 8.08,13.9 9.92,13.9 9.99,13.82 10.86,12.95 10.86,12.46 11.03,12.29 v1(11.56,12.29)
CHAN2: length 16.4
  TOP w0.203: U1.39 8.8,12.19 8.29,11.68 v1(6.6,11.68) ; J1.4 8.89,3.05 8.28,3.66 6.5,3.66 v1(6.1,4.06)
  BOTTOM w0.203: v1(6.1,4.06) 6.1,11.18 v1(6.6,11.68)
CHAN3: length 7.2
  TOP w0.203: J1.5 11.43,2.26 11.18,2.51 11.18,2.54 10.41,3.3 10.41,5.08 11.18,5.84 11.18,6.4 10.97,6.6 U1.50
CHAN4: length 4.8
  TOP w0.203: J1.6 13.27,1.97 12.52,1.97 12.17,2.33 12.17,3.8 12.19,3.82 U1.52
CHAN5: length 5.1
  TOP w0.203: U1.56 14.22,2.57 15.52,1.27 J1.7
CHAN6: length 7.1
  TOP w0.203: J1.8 17.93,1.27 16.9,2.3 15.12,2.3 14.73,2.68 U1.57
CHAN7: length 7.4
  TOP w0.203: U1.61 16.76,2.94 17.45,2.26 19.46,2.26 19.5,2.22 20.64,2.22 J1.9
CHAN8: length 9.4
  TOP w0.203: U1.62 17.27,3.11 17.79,2.59 19.6,2.59 19.64,2.55 21.86,2.55 23.14,1.27 J1.10
CHAN9: length 8.4
  TOP w0.203: U1.68 20.32,3.82 21.26,2.88 22.52,2.88 22.99,2.41 25.53,2.41 J1.11
CHAN10: length 9
  TOP w0.203: J1.12 27.72,2.76 23.32,2.76 22.38,3.7 22.38,4.82 U1.72
CHAN11: length 11
  TOP w0.203: J1.13 30.58,1.27 30.2,1.65 30.2,1.68 29.62,2.26 29.59,2.26 28.71,3.13 23.54,3.13 22.86,3.81 U1.73
CHAN12: length 18.9
  TOP w0.203: U1.82 27.23,9.65 27.26,9.68 27.29,9.68 27.3,9.7 v1(27.84,9.7) 28.04,9.9 28.04,10.01 28.18,10.14 29.99,10.14 30.28,9.86 30.28,9.4 v1(29.85,8.97)
  BOTTOM w0.203: v1(29.85,8.97) 29.41,8.53 29.41,5.51 31.06,3.87 31.11,3.87 31.19,3.78 34.02,3.78 34.2,3.96 34.64,3.96 34.99,3.61 34.99,1.97 J1.14
CHAN13: length 22
  TOP w0.203: U1.83 26.99,10.16 27.05,10.1 27.49,10.1 27.62,10.23 27.62,10.23 27.94,10.55 27.94,10.93 28.37,11.36 v1(30.35,11.36)
  BOTTOM w0.203: v1(30.35,11.36) 30.68,11.36 31.02,11.02 31.02,10.24 30.48,9.7 30.48,4.91 31.19,4.2 31.24,4.2 31.33,4.11 33.88,4.11 34.06,4.29 36.22,4.29 36.83,3.68 J1.15
CHAN14: length 21
  TOP w0.203: v1(27.27,10.63) 26.74,10.63 26.7,10.67 U1.84 ; J1.16 38.38,1.27 37.39,2.26 30.34,2.26 v1(29.34,3.26)
  BOTTOM w0.203: 28.47,5.13 28.47,4.13 v1(29.34,3.26) ; 28.47,5.13 28.47,7.8 28.02,8.26 27.69,8.26 27.28,8.66 27.28,10.09 27.27,10.1 v1(27.27,10.63) ; 28.47,5.13 28.5,5.11
CHAN15: length 22.2
  TOP w0.203: U1.35 11.34,14.22 11.68,13.88 v1(12.17,13.39)
  BOTTOM w0.203: v1(12.17,13.39) 11,14.56 8.35,14.56 8.03,14.88 6.88,14.88 3.28,14.88 2.54,15.62 2.54,22.86 J2.1
CHAN16: length 15.9
  TOP w0.203: v1(8.7,15.09) 9.06,14.73 U1.34
  BOTTOM w0.203: v1(8.7,15.09) 8.32,15.47 3.58,15.47 3.05,16 3.05,23.37 J2.2
CHAN17: length 19.4
  TOP w0.203: v1(12.17,14.22) 11.79,14.6 11.56,14.6 10.92,15.24 U1.33
  BOTTOM w0.203: J2.3 5.28,23.06 5.28,19.75 4.67,19.15 4.67,16.61 5.41,15.88 9.4,15.88 10.29,14.99 11.04,14.99 11.43,14.6 11.79,14.6 v1(12.17,14.22)
CHAN18: length 19.8
  TOP w0.203: U1.32 10.9,15.75 11.44,15.21 12.73,15.21 13.21,15.69 13.21,18.01 12.04,19.18 8.63,19.18 8.48,19.02 6.81,19.02 6.5,19.33 6.5,22.73 7.9,24.13 J2.4
CHAN19: length 4.8
  TOP w0.203: J2.5 12.45,23.11 12.95,23.11 13.72,22.35 U1.21
CHAN20: length 3.7
  TOP w0.203: U1.20 14.22,22.86 13.97,23.11 J2.6
CHAN21: length 4.6
  TOP w0.203: J2.7 15.81,23.43 15.3,23.43 14.73,22.86 U1.19
CHAN22: length 4.1
  TOP w0.203: U1.13 17.78,22.1 19.05,23.37 J2.8
CHAN23: length 5.5
  TOP w0.203: J2.9 20.6,24.13 18.29,21.82 U1.12
CHAN24: length 5.5
  TOP w0.203: U1.7 20.83,21.82 23.14,24.13 J2.10
CHAN25: length 6.5
  TOP w0.203: U1.4 22.35,21.72 23.5,22.86 25.4,22.86 J2.11
CHAN26: length 8.4
  TOP w0.203: U1.3 22.86,21.59 23.75,22.48 27.56,22.48 J2.12
CHAN27: length 12.3
  TOP w0.203: U1.97 27.43,17.27 27.58,17.13 29.66,17.13 30.48,17.94 30.48,18.55 v1(30.1,18.92)
  BOTTOM w0.203: J2.13 30.1,22.48 v1(30.1,18.92)
CHAN28: length 14.6
  TOP w0.203: U1.94 26.72,15.75 27,16.03 30.38,16.03 30.86,16.51 30.86,18.39 30.86,18.39 v1(30.86,18.92)
  BOTTOM w0.203: v1(30.86,18.92) 30.86,20.7 J2.14
CHAN29: length 20.7
  TOP w0.203: v1(24.18,14.41) 24.18,14.95 24.48,15.24 U1.93 26.97,15.24 v1(27.22,15.49)
  BOTTOM w0.203: J2.15 34.29,21.59 34.29,16 33.38,15.09 32.49,15.09 32.48,15.08 30.36,15.08 29.8,15.64 27.9,15.64 27.76,15.49 v1(27.22,15.49)
CHAN30: length 23
  TOP w0.203: v1(26.93,13.12) 26.84,13.21 U1.89 24.6,13.21 v1(24.13,13.68)
  BOTTOM w0.203: J2.16 38.38,24.13 35.01,20.76 35.01,16.21 33.53,14.73 29.97,14.73 29.81,14.57 27.79,14.57 27.4,14.18 27.4,13.62 27.31,13.53 27.31,13.5 v1(26.93,13.12)
CHAN31: length 23.8
  TOP w0.203: v1(27.56,12.74) 27.18,12.36 26.75,12.36 26.42,12.7 U1.88
  BOTTOM w0.203: J2.17 40.77,22.99 38.99,22.99 35.34,19.34 35.34,15.27 34.24,14.17 31.49,14.17 30.88,13.57 29.88,13.57 29.86,13.59 28.41,13.59 v1(27.56,12.74) 27.41,12.74
CHAN_CLK: length 16.4
  TOP w0.203: J1.1 0.57,1.97 0.57,5.9 2.29,7.62 5.59,7.62 6.1,8.13 6.1,9.14 6.49,9.54 8.65,9.54 8.76,9.65 U1.44
D0: length 9.8
  TOP w0.203: v1(27.68,11.67) 28.19,12.19 28.19,12.97 27.45,13.72 U1.90
  BOTTOM w0.203: U4.2 27.14,8.17 26.74,8.57 26.74,10.85 26.75,10.87 26.75,11.02 27.03,11.3 27.3,11.3 v1(27.68,11.67)
D1: length 10.9
  TOP w0.203: U1.77 24.51,7.11 22.76,8.86 v1(22.76,10.67)
  BOTTOM w0.203: v1(22.76,10.67) 23.88,10.67 25.54,9 U4.4
D2: length 10
  TOP w0.203: v1(23.5,10.03) 23.5,8.73 24.6,7.62 U1.78
  BOTTOM w0.203: U4.5 24.74,8.13 24.49,8.38 24.26,8.38 24.16,8.48 24.16,9.12 24,9.27 23.75,9.27 23.62,9.14 23.62,8.51 23.5,8.38 23.24,8.38 23.11,8.51 23.11,9.65 v1(23.5,10.03)
D3: length 9.8
  TOP w0.203: U1.85 24.6,11.18 24.47,11.3 v1(21.08,11.3)
  BOTTOM w0.203: U4.7 23.14,8.01 21.59,9.56 21.59,10.79 v1(21.08,11.3)
D4: length 10.7
  TOP w0.203: v1(20.32,11.3) 20.7,11.68 20.71,11.68 20.86,11.84 24.45,11.84 24.6,11.68 U1.86
  BOTTOM w0.203: v1(20.32,11.3) 21.08,10.54 21.08,9.27 22.34,8.01 U4.8
D5: length 10.7
  TOP w0.203: v1(19.18,10.41) 19.18,9.53 21.84,6.86 U1.71
  BOTTOM w0.203: v1(19.18,10.41) 19.18,9.58 20.74,8.01 U4.10
D6: length 10.8
  TOP w0.203: U1.70 21.34,6.6 18.41,9.53 v1(18.41,10.41)
  BOTTOM w0.203: 19.94,6.99 19.94,8.04 18.41,9.56 v1(18.41,10.41)
D7: length 10
  TOP w0.203: v1(17.53,10.41) 17.53,9.4 18.8,8.13 18.8,6.55 18.67,6.43 18.67,5.98 18.8,5.86 U1.65
  BOTTOM w0.203: 18.34,6.99 18.34,8.58 17.53,9.4 v1(17.53,10.41)
D8: length 9.7
  TOP w0.203: v1(17.91,14.86) 17.91,16.89 16.28,18.52 16.28,19.09 16.28,19.1 16.28,19.49 16.26,19.52 U1.16
  BOTTOM w0.203: U4.42 18.34,16.82 17.91,16.38 v1(17.91,14.86)
D9: length 10.1
  TOP w0.203: U1.15 16.76,19.05 18.8,17.02 v1(18.8,14.86)
  BOTTOM w0.203: v1(18.8,14.86) 18.8,15.75 19.94,16.89 U4.44
D10: length 9.7
  TOP w0.203: U1.10 19.3,19.52 19.33,19.49 19.33,18.01 20.06,17.28 20.06,15.24 v1(19.68,14.86)
  BOTTOM w0.203: v1(19.68,14.86) 20.74,15.91 U4.45
D11: length 9.8
  TOP w0.203: U1.9 19.81,18.29 20.7,17.4 v1(20.7,14.86)
  BOTTOM w0.203: U4.47 22.34,16.5 v1(20.7,14.86)
D12: length 9.6
  TOP w0.203: v1(21.72,14.86) 21.72,15.39 21.84,15.52 21.84,17.27 21.34,17.78 U1.6
  BOTTOM w0.203: U4.48 23.14,16.54 22.09,15.49 22.09,15.24 v1(21.72,14.86)
D13: length 10.4
  TOP w0.203: U1.5 21.84,18.54 22.61,17.78 v1(22.61,14.86)
  BOTTOM w0.203: U4.50 24.74,16.84 24.41,16.51 24.41,16.5 24.1,16.19 23.31,16.19 22.98,15.86 22.98,15.24 v1(22.61,14.86)
D14: length 9.9
  TOP w0.203: U1.99 23.75,18.29 23.24,17.78 23.24,15.99 23.09,15.84 23.09,15.27 v1(23.5,14.86)
  BOTTOM w0.203: U4.51 25.54,16.52 24.14,15.12 23.96,15.12 23.7,14.86 v1(23.5,14.86)
D15: length 9.8
  TOP w0.203: U1.98 26.8,17.78 27.33,18.31 29.69,18.31 v1(29.89,18.11)
  BOTTOM w0.203: U4.53 27.14,16.93 27.56,16.51 29.34,16.51 29.47,16.64 29.52,16.64 29.89,17.02 v1(29.89,18.11)
DONE: length 27.3
  TOP w0.203: D2.1 27.39,5.55 27.81,5.97 R4.1 30.9,5.64 31.24,5.29 v1(31.24,5.04) ; v1(43.95,9.27) 44.32,9.65 44.32,9.81 44.65,10.13 44.68,10.13 45.03,10.49 U2.16
  BOTTOM w0.203: v1(43.95,9.27) 43.41,9.27 43.15,9.53 38.45,9.53 38.1,9.87 36.27,9.87 36,9.6 36,5.52 35.1,4.62 33.92,4.62 33.74,4.45 31.83,4.45 v1(31.24,5.04)
FLSH_CS#: length 11.4
  TOP w0.203: JP1.2 1.52,16.41 0.51,15.39 0.51,13.46 2.13,11.84 4.81,11.84 5.25,11.41 U3.1
FLSH_DSBL: length 58.6
  TOP w0.203: v1(33.66,2.79) 34.22,2.79 34.39,2.62 38.58,2.62 38.62,2.67 39.12,2.67 39.37,2.92 R27.1 ; 3.81,14.54 R14.2 ; 3.81,14.54 3.81,12.65 4.14,12.32 5.26,12.32 v1(5.64,11.94) ; 3.81,14.54 3.49,14.86 JP1.1
  BOTTOM w0.203: v1(33.66,2.79) 33.12,2.26 28.8,2.26 28.79,2.25 27.09,2.25 27.08,2.26 26.26,2.26 26.25,2.25 24.55,2.25 24.54,2.26 23.72,2.26 23.71,2.25 22.01,2.25 22,2.26 16.1,2.26 16.09,2.25 14.39,2.25 14.38,2.26 13.56,2.26 13.55,2.25 12.37,2.25 12.03,2.59 2.75,2.59 2.51,2.83 2.51,3.78 2.83,4.1 4.11,4.1 4.25,4.23 4.25,6.02 5.64,7.42 v1(5.64,11.94) 5.33,11.94 4.83,11.43 R13.1
FPGA_CLK: length 27.5
  TOP w0.203: U1.43 11.15,10.16 11.4,10.41 v1(11.94,10.41) ; v1(34.54,12.45) 34.92,12.45 35.22,12.74 R7.1
  BOTTOM w0.203: v1(11.94,10.41) 12.47,10.41 14,11.94 27.01,11.94 27.26,12.19 27.44,12.19 27.45,12.21 27.9,12.21 27.91,12.19 31.17,12.19 31.66,11.71 33.37,11.71 34.11,12.45 v1(34.54,12.45)
MCLR: length 19.8
  TOP w0.203: v1(45.47,2.21) 45.09,2.59 44.34,3.33 44.34,5.61 42.93,7.03 42.93,7.15 42.89,7.19 42.89,9.94 41.7,11.14 U2.4 38.73,11.14 38.69,11.18 R1.2
  BOTTOM w0.203: v1(45.47,2.21) 46,2.21 46.05,2.26 48.54,2.26 J1.20
OSC1: length 8.5
  TOP w0.203: C3.2 40.89,16.93 40.99,16.83 Y1.3 41.82,13.37 40.88,12.44 U2.2
OSC2: length 13.5
  TOP w0.203: U2.3 38.62,11.79 38.21,12.2 38.21,12.98 37.94,13.25 37.94,13.69 38.43,14.18 38.43,19.63 40.39,21.59 R3.1
PROG#: length 2.8
  TOP w0.203: R2.1 36.96,9.18 U2.7
RAS#: length 9.7
  TOP w0.203: U1.59 15.75,5.88 15.9,6.03 15.9,8.86 15.28,9.49 v1(15.28,10.41)
  BOTTOM w0.203: v1(15.28,10.41) 15.28,9.18 14.34,8.24 14.34,6.99
SDRAM_CLK: length 18.6
  TOP w0.203: U1.40 11.94,11.68 12.7,12.45 12.7,14.71 13.99,16 v1(15.14,16) 15.14,14.12 12.19,11.18 U1.41
  BOTTOM w0.203: U4.38 v1(15.14,16)
SENSE_USB: length 12.8
  TOP w0.203: R22.1 46.14,4.66 46.1,4.7 46.1,4.7 45.99,4.81 v1(45.99,4.88) 45.62,5.25 45.62,5.7 43.81,7.5 43.81,8.39 44.48,9.05 44.48,9.07 44.81,9.4 44.81,9.49 45.12,9.8 45.21,9.8 45.24,9.83 U2.15
  BOTTOM w0.203: v1(45.99,4.88) 46.37,5.25 46.4,5.25 46.43,5.28 47.37,5.28 48.42,4.23 R19.1
TCK: length 18.1
  TOP w0.203: J3.2 52,5.91 49.07,5.91 47.74,7.23 U2.11 45.52,7.23 45.26,7.49 v1(44.58,7.49) ; v1(38.42,8.51) 38.04,8.13 38.04,7.33 37.7,6.99 R9.1
  BOTTOM w0.203: v1(44.58,7.49) 44.2,7.87 41.66,7.87 41.02,8.51 v1(38.42,8.51)
TDI: length 21.5
  TOP w0.203: U2.9 38.95,7.88 38.63,7.57 38.63,7.51 38.62,7.49 38.62,6.97 38.63,6.96 38.63,5.61 38.19,5.17 38.19,4.95 ; 38.19,4.95 R5.1 ; 38.19,4.95 v1(38.19,3.17)
  BOTTOM w0.203: v1(38.19,3.17) 38.62,2.74 40.6,2.74 45.24,2.74 45.25,2.74 45.69,2.74 45.69,2.74 47.73,2.74 50.6,2.74 50.67,2.67 J3.1
TDO: length 20
  TOP w0.203: J3.4 54.1,6.35 51.69,6.35 50.5,7.54 50.5,7.59 50.18,7.9 50.14,7.9 49.5,8.53 U2.13 45.47,8.53 45.19,8.26 v1(44.65,8.26)
  BOTTOM w0.203: R6.1 40.92,9.14 41.43,8.63 44.28,8.63 v1(44.65,8.26)
TMS: length 29.4
  TOP w0.203: v1(40.51,3.3) 40.51,3.84 40.92,4.24 40.92,5.91 41.78,6.77 41.78,7.75 41,8.53 U2.8
  BOTTOM w0.203: R8.1 37.85,6.99 38.35,6.48 38.35,4.06 39.12,3.3 v1(40.51,3.3) 41.05,3.3 41.27,3.07 45.11,3.07 47.59,3.07 47.59,3.07 50.57,3.07 51.31,3.81 53.72,3.81 53.72,3.81 53.96,3.81 54.16,3.61 54.17,3.6 54.17,3.59 54.17,3.49 J3.3
TP1: length 18.2
  TOP w0.203: U2.14 48.31,9.18 v1(48.84,9.72)
  BOTTOM w0.203: v1(48.84,9.72) 48.26,9.72 47.24,10.73 47.24,18.42 47.63,18.8 47.63,18.93 47.63,22.09 46.99,22.73 J2.19
TP2: length 25.1
  TOP w0.203: U2.12 48.25,7.88 48.77,7.37 v1(49.96,7.37)
  BOTTOM w0.203: v1(49.96,7.37) 49.96,9.36 50.55,9.95 50.55,13.64 51.31,14.4 51.31,19.3 51.62,19.61 52.89,19.61 53.43,20.16 53.43,22 51.31,24.13 J2.20
USB_D+: length 7
  TOP w0.203: U2.19 47.41,12.44 52.97,12.44 53.23,12.69 53.26,12.69 53.27,12.7 J7.3
USB_D-: length 7
  TOP w0.203: J7.2 53.44,12.03 53.32,12.03 47.93,12.03 47.69,11.79 U2.18
VUSB: length 2.9
  TOP w0.203: U2.17 48.21,11.14 v1(48.44,10.9)
  BOTTOM w0.203: v1(48.44,10.9) 48.44,11.14 48.77,11.47 C1.1
WE#: length 10
  TOP w0.203: U1.64 18.29,7.62 16.76,9.14 v1(16.76,10.41)
  BOTTOM w0.203: 15.94,6.99 15.94,8.04 16.76,8.86 v1(16.76,10.41)
N10334858: length 27.5
  TOP w0.203: R4.2 33.4,5.97 33.78,5.59 33.78,3.68 32.77,2.67 32.72,2.67 32.64,2.59 31.11,2.59 31.08,2.63 30.86,2.63 v1(30.48,3.01) ; U1.54 13.21,4.06 12.7,3.56 v1(12.7,2.79)
  BOTTOM w0.203: v1(12.7,2.79) 13.23,2.79 13.4,2.62 17.17,2.62 17.2,2.59 29.91,2.59 29.95,2.63 30.1,2.63 v1(30.48,3.01)
N10334861: length 30
  TOP w0.203: U1.2 23.37,21.58 23.83,22.04 28.2,22.04 28.21,22.05 31.8,22.05 34.01,19.84 34.01,10.44 34.58,9.87 35.86,9.87 36,9.74 36,9.65 36.07,9.58 36.07,5.16 35.86,4.95 R5.2
N10334864: length 19.7
  TOP w0.203: v1(34.16,6.48) 34.16,5.94 34.42,5.69 v1(34.42,3.43) ; U1.75 23.88,3.81 24.22,3.46 28.37,3.46 28.84,3.94 28.89,3.94 28.94,3.99 v1(29.47,3.99)
  BOTTOM w0.203: v1(29.47,3.99) 29.92,3.54 30.88,3.54 31.24,3.17 31.24,2.92 31.57,2.59 32.69,2.59 33.53,3.43 v1(34.42,3.43) ; R6.2 34.44,9.14 34.16,8.87 v1(34.16,6.48)
N10334867: length 28.8
  TOP w0.203: v1(34.93,8) 33.14,8 32.71,8.43 31.65,8.43 31.37,8.71 31.37,15.48 32.36,16.47 32.36,20.47 31.12,21.71 23.99,21.71 23.88,21.59 U1.1 23.88,19.52 24.22,19.17
  BOTTOM w0.203: R8.2 35.22,7.71 v1(34.93,8)
N10334870: length 11.3
  TOP w0.203: U1.76 26.66,6.6 26.78,6.48 30.03,6.48 30.54,6.99 v1(31.37,6.99) 32.65,6.99 32.67,6.96 33.11,6.96 33.14,6.99 33.92,6.99 33.94,7.01 34.38,7.01 34.41,6.99 R9.2
  BOTTOM w0.203: R12.1 31.66,7.28 v1(31.37,6.99)
N10335069: length 19.1
  TOP w0.203: v1(32.38,15.62) 32.76,15.24 32.89,15.24 33.53,14.61 33.53,9.53 33.91,9.14 R2.2 ; v1(31.62,17.44) 31.62,18.92 31.08,19.46 28.35,19.46 27.69,18.8 U1.100
  BOTTOM w0.203: v1(32.38,15.62) 31.7,15.62 31.54,15.78 R11.1 31.54,17.35 v1(31.62,17.44)
N10919966: length 20
  TOP w0.203: R24.2 30.95,3.94 32.05,5.04 v1(32.64,5.04) ; U2.1 38.85,13.09 38.48,13.46 v1(38.48,13.47)
  BOTTOM w0.203: v1(32.64,5.04) 32.06,5.61 31.09,5.61 30.84,5.87 30.84,9.17 31.06,9.4 31.75,9.4 J8.2 34.23,11.88 34.44,11.88 34.47,11.9 34.84,11.9 35.35,12.41 35.36,12.41 35.56,12.61 35.99,12.61 36.12,12.74 36.12,13.79 36.56,14.22 38.25,14.22 38.48,14 v1(38.48,13.47)
N10920028: length 1.9
  TOP w0.203: D1.1 R10.2
N10920048: length 10
  TOP w0.203: U2.5 41.46,10.49 42.47,9.47 42.47,4.49 42.18,4.19 41.98,4.19 41.7,3.9 R10.1
N10920094: length 7.1
  TOP w0.203: U2.6 37.6,9.83 37.56,9.87 36.86,9.87 36.29,10.45 36.27,10.45 36.07,10.65 36.07,11.7 36.92,12.55 R7.2
N10926413: length 5
  TOP w0.203: C2.2 44.99,18.63 44.59,19.03 Y1.1 43.52,19.96 43.39,20.08 R3.2
N10932650: length 5.4
  TOP w0.203: U3.2 3.98,8.47 v1(4.06,8.38)
  BOTTOM w0.203: R15.2 3.47,7.79 v1(4.06,8.38)
N10944133: length 21.4
  TOP w0.203: J7.1 55.04,11.1 55.5,11.56 55.5,14.73 54.86,15.37 51.94,15.37 50.67,14.1 v1(49.78,14.1) 48.97,14.1 R20.1
  BOTTOM w0.203: v1(49.78,14.1) 50.16,13.72 50.16,10.03 49.15,9.02 R19.2
N10944365: length 24.8
  BOTTOM w0.203: 39.5,6.22 40.49,6.22 40.75,6.48 40.77,6.48 40.78,6.48 43.05,6.48 43.31,6.22 47.12,6.22 47.73,6.83 47.73,8.98 46.81,9.91 44.19,9.91 38.61,9.91 38.23,10.29 37.86,10.29 36.97,11.18 R21.1 36.92,12.48 37.04,12.61 C32.1
N10944381: length 36.5
  TOP w0.203: v1(48.01,5.59) 48.51,5.08 50.04,5.08 v1(50.8,4.32)
  BOTTOM w0.203: v1(48.01,5.59) 48.01,6.12 48.39,6.5 48.39,8.79 46.86,10.32 46.86,18.67 46.1,19.43 36.58,19.43 36.07,18.92 R23.1 ; C34.1 51.56,9.42 50.8,8.66 v1(50.8,4.32)
N10948862: length 4.5
  TOP w0.203: R28.2 9.74,21.59 ; 9.74,21.59 R18.2 ; 9.74,21.59 11.29,21.59 11.68,21.2 U1.25
N10957517: length 2
  TOP w0.203: v1(24.79,4.45) 25.15,4.19 D2.2
  BOTTOM w0.203: D2.2 25.04,4.19 v1(24.79,4.45)
N10958217: length 2.4
  TOP w0.203: R26.1 2.68,20.11 2.51,19.94 JP1.3
N10958271: length 4.2
  TOP w0.203: U2.10 40.65,7.23 40.89,6.99 40.89,6.35 40.51,5.97 40.51,5.58 40.1,5.17 R27.2

## Copper pours and planes (outline as drawn; the poured copper is in the pictures)
+5V on PWR: 45.85,3.56 48.26,3.56 49.4,4.7 49.4,21.84 48.9,22.35 45.59,22.35 44.7,21.46 44.7,4.7
GND_POWER on TOP: 0.22,0.35 0.22,25.25 53.81,25.25 61.94,17.12 61.94,8.74 53.56,0.35 ; 76 cut-outs
GND_POWER on BOTTOM: 0.22,0.23 0.22,25.12 53.81,25.12 61.94,16.99 61.94,8.61 53.56,0.23 ; 57 cut-outs
GND_POWER on GND: 0.25,25.15 53.85,25.15 61.98,17.02 61.98,8.64 53.59,0.25 0.25,0.25
VCC_1.2V on PWR: 18.54,2.79 17.78,3.56 17.78,8.13 16.26,9.65 6.35,9.65 5.84,10.16 5.84,13.21 9.91,13.21 13.46,16.76 14.73,16.76 14.99,17.02 14.99,21.84 15.75,22.61 17.78,22.61 18.29,22.1 18.29,12.19 19.56,10.92 19.81,11.18 32.26,11.18 33.53,12.45 33.53,15.49 34.54,16.51 40.89,16.51 42.42,14.99 42.42,12.7 40.64,10.92 35.05,10.92 33.27,9.14 33.27,8.64 21.59,8.64 20.83,7.87 20.83,5.21 19.68,5.21 19.56,5.08 19.56,4.06 19.18,3.68 19.18,2.92 19.3,2.79
VCC_3.3V on PWR: 0.51,24.89 53.85,24.89 61.72,17.02 61.72,8.64 53.59,0.51 0.51,0.51 ; 1 cut-out

## Text on the board
Ref Des/Silkscreen Top: IO15 | IOCLK | IO16 | IO0 | IO17 | IO1 | IO2 | IO18 | IO19 | IO3 | IO20 | IO4 | IO21 | IO5 | IO22 | IO6 | IO23 | IO7 | IO24 | IO8 | 3V3 | IO25 | IO9 | IO26 | IO10 | IO27 | IO11 | IO28 | IO12 | IO29 | IO13 | IO14 | IO30 | IO31 | +5V | GND | 1V2 | ANA0 | RST | TCK | TDI | ANA1 | TDO | TMS | SCHOLAR
COMPVAL_TYPE_TOP: FIGURE | SIZE | 12.0 | 36.0 | DRILL CHART: TOP to BOTTOM | ALL UNITS ARE IN MILS | PLATED | QTY | 152 | 54
